# EAGLE board SparkFun_Qwiic_ADXL313-Panel (EAGLE 9.6.2), part 1 of 4
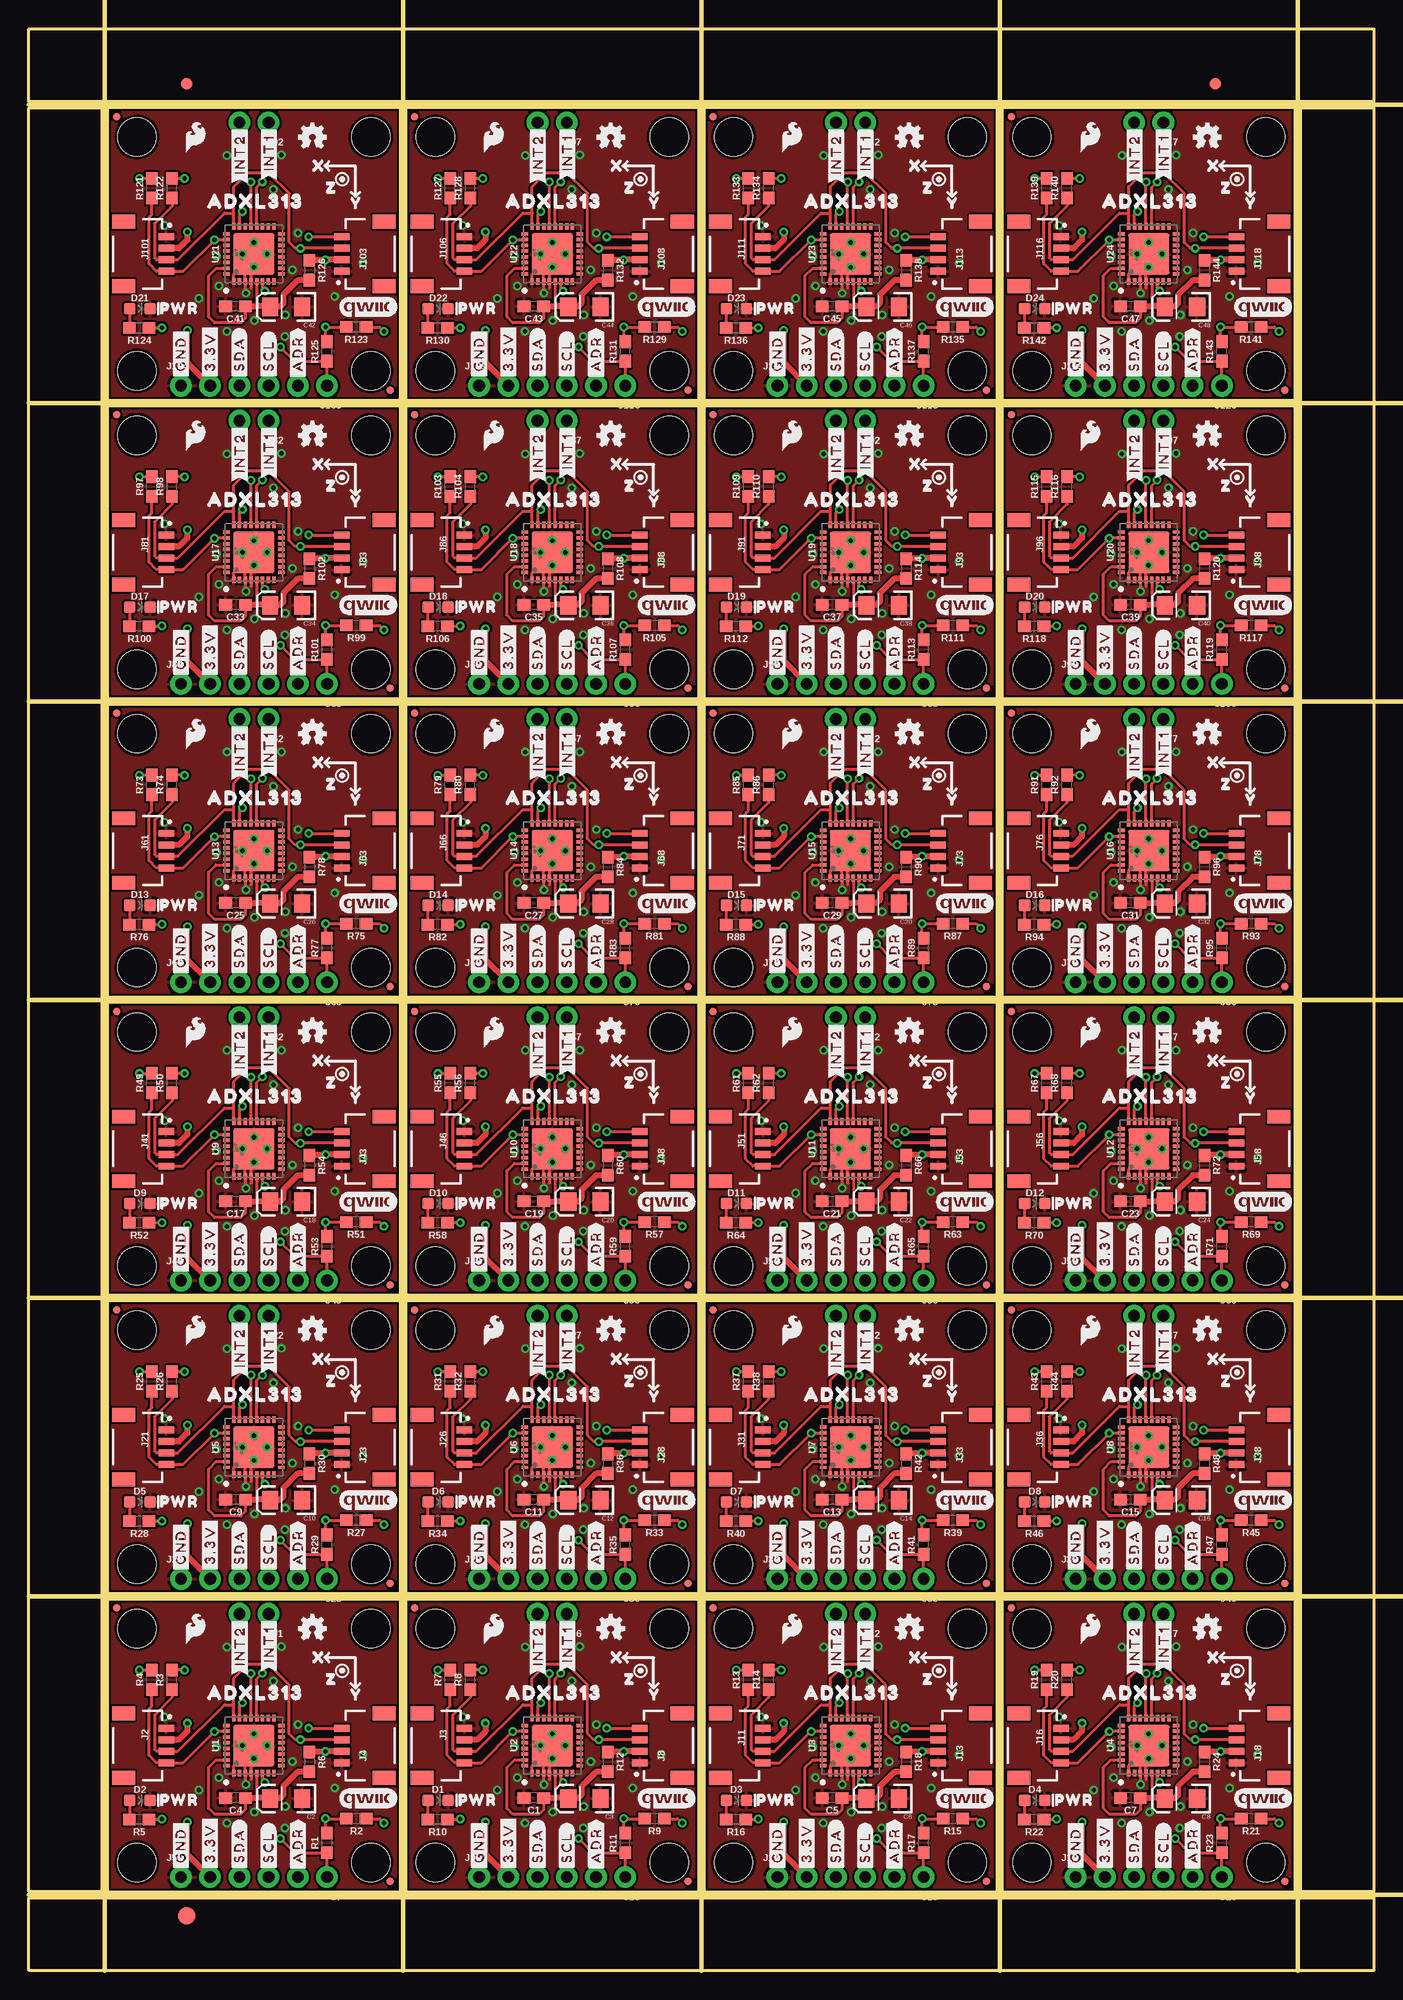
[diagram p0: board, top side]
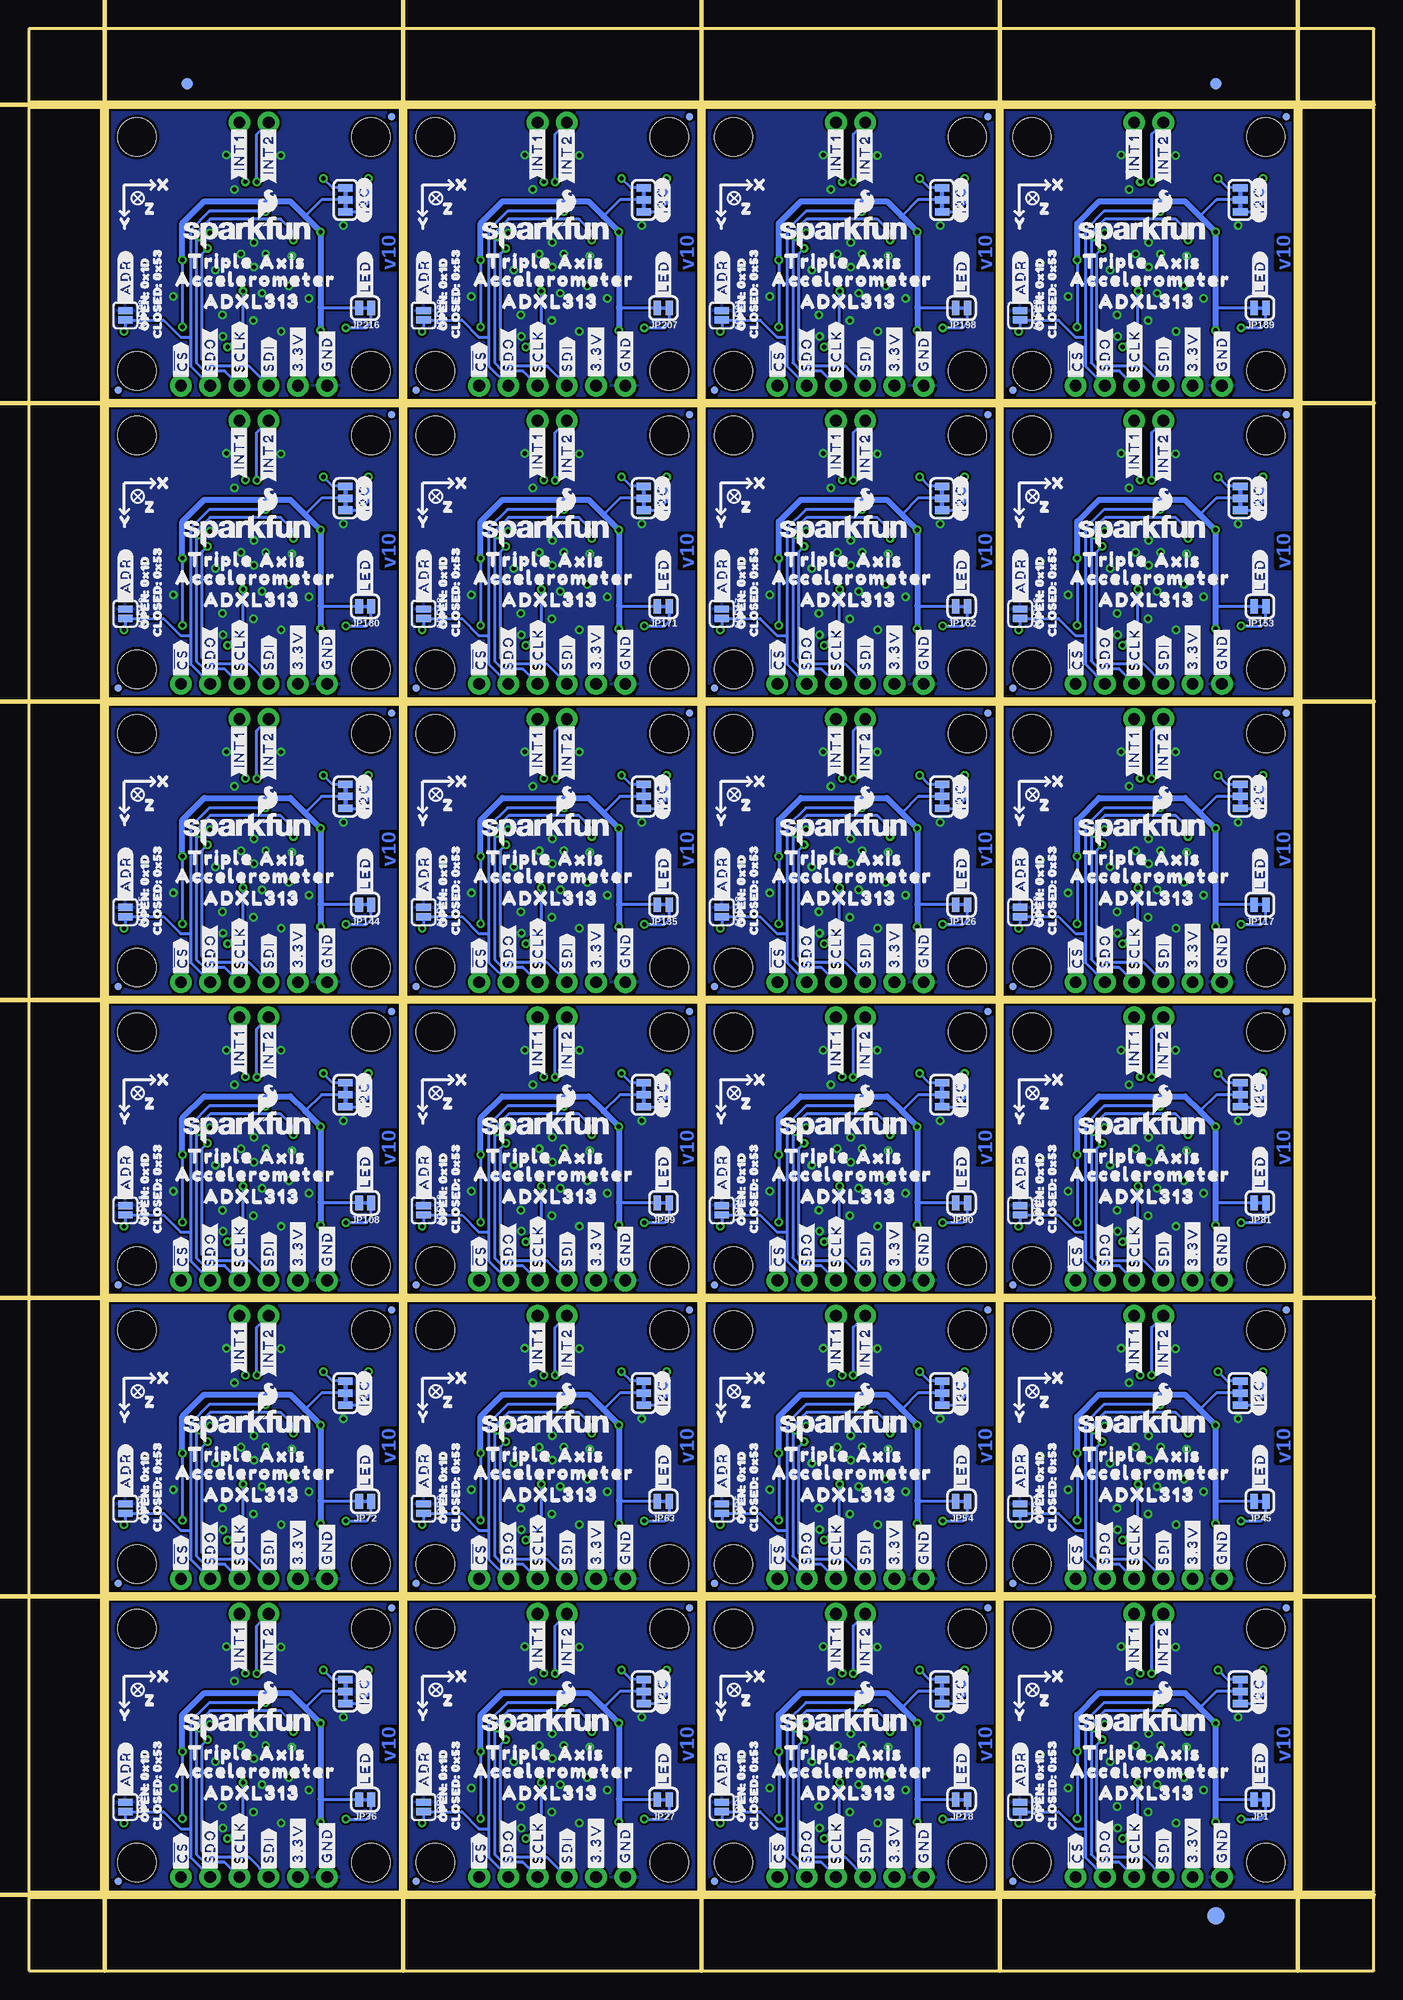
[diagram p1: board, bottom side, seen from below]

Size 116.84 x 168.66 mm. Coordinates in mm from the lower left corner, seen from the top.
Outline: 112 segments
Copper layers (1*16): Top 0.035mm / dielectric 1.5mm / Bottom 0.035mm
Design rules "SparkFun_Qwiic_ADXL313": minimum track width 7mil, minimum drill 15mil, track to track 7mil, track to pad 7mil, pad to pad 7mil, via to via 7mil, smd to smd 7mil, copper to edge 7mil, drill to drill 7mil, minimum pad ring 7mil, minimum via ring 7mil, stop-mask expansion 4mil, vias tented up to drill 25mil, thermal gap 10mil
tRestrict: area 19.1,17.1 to 19.1,17.3; area 17.4,17.1 to 17.4,17.3; area 19.5,17.7 to 19.7,17.8; area 21.4,19.5 to 21.4,19.7; area 19.5,21.4 to 19.6,21.4; area 17.7,19.5 to 17.8,19.6; area 45,17.1 to 45,17.3; area 43.3,17.1 to 43.3,17.3; area 45.4,17.7 to 45.6,17.8; area 47.3,19.5 to 47.3,19.7; area 45.4,21.4 to 45.5,21.4; area 43.6,19.5 to 43.7,19.6; 132 more areas
Milling: 12 lines

## Footprints (pad centres in the part's own frame; a part is rotated, then mirrored left to right if it is on the bottom)
SMT-JUMPER_2_NO_SILK = smd 0.635 x 1.27: 1 -0.406,0; 2 0.406,0
0603 = smd 1.1 x 1: 1 -0.85,0; 2 0.85,0
EIA3216 = smd 1.4 x 1.6: A 1.4,0; C -1.4,0
LED-0603 = smd 1 x 1: A -0.877,0; C 0.877,0
FIDUCIAL-1X2 = smd 1 x 1: 1 0,0
FIDUCIAL-1.5X3 = smd 1.5 x 1.5: 1 0,0
SMT-JUMPER_3_2-NC_TRACE_SILK = smd 0.66 x 1.27: 1 -1.041,0; 2 0,0; 3 1.041,0
1X02_NO_SILK = drill 1.016 pad 1.88: 1 0,0; 2 2.54,0
JST04_1MM_RA = smd 0.6 x 1.35: 1 -1.5,0; 2 -0.5,0; 3 0.5,0; 4 1.5,0 | smd 1.2 x 2: NC1 2.8,-3.675; NC2 -2.8,-3.675
1X04_NO_SILK = drill 1.016 pad 1.88: 1 0,0; 2 2.54,0; 3 5.08,0; 4 7.62,0
SMT-JUMPER_2_NC_TRACE_SILK = smd 0.66 x 1.27: 1 -0.521,0; 2 0.521,0
MICRO-FIDUCIAL = smd 0.635 x 0.635: 1 0,0
STAND-OFF = hole 3.302: 0,0
LFCSP = smd 0.57 x 0.3: 1 -2.385,1.75; 2 -2.385,1.25; 3 -2.385,0.75; 4 -2.385,0.25; 5 -2.385,-0.25; 6 -2.385,-0.75; 7 -2.385,-1.25; 8 -2.385,-1.75; 17 2.385,-1.75; 18 2.385,-1.25; 19 2.385,-0.75; 20 2.385,-0.25; 21 2.385,0.25; 22 2.385,0.75; 23 2.385,1.25; 24 2.385,1.75 | smd 0.3 x 0.57: 9 -1.75,-2.385; 10 -1.25,-2.385; 11 -0.75,-2.385; 12 -0.25,-2.385; 13 0.25,-2.385; 14 0.75,-2.385; 15 1.25,-2.385; 16 1.75,-2.385; 25 1.75,2.385; 26 1.25,2.385; 27 0.75,2.385; 28 0.25,2.385; 29 -0.25,2.385; 30 -0.75,2.385; 31 -1.25,2.385; 32 -1.75,2.385 | smd 3.6 x 3.6: EPAD 0,0

## Placement (x,y rotation side)
ADR  [SMT-JUMPER_2_NO_SILK]  30.73,14.22 270 bottom
ADR1  [SMT-JUMPER_2_NO_SILK]  56.64,14.22 270 bottom
ADR2  [SMT-JUMPER_2_NO_SILK]  82.55,14.22 270 bottom
ADR3  [SMT-JUMPER_2_NO_SILK]  108.46,14.22 270 bottom
ADR4  [SMT-JUMPER_2_NO_SILK]  30.73,40.13 270 bottom
ADR5  [SMT-JUMPER_2_NO_SILK]  56.64,40.13 270 bottom
ADR6  [SMT-JUMPER_2_NO_SILK]  82.55,40.13 270 bottom
ADR7  [SMT-JUMPER_2_NO_SILK]  108.46,40.13 270 bottom
ADR8  [SMT-JUMPER_2_NO_SILK]  30.73,66.04 270 bottom
ADR9  [SMT-JUMPER_2_NO_SILK]  56.64,66.04 270 bottom
ADR10  [SMT-JUMPER_2_NO_SILK]  82.55,66.04 270 bottom
ADR11  [SMT-JUMPER_2_NO_SILK]  108.46,66.04 270 bottom
ADR12  [SMT-JUMPER_2_NO_SILK]  30.73,91.95 270 bottom
ADR13  [SMT-JUMPER_2_NO_SILK]  56.64,91.95 270 bottom
ADR14  [SMT-JUMPER_2_NO_SILK]  82.55,91.95 270 bottom
ADR15  [SMT-JUMPER_2_NO_SILK]  108.46,91.95 270 bottom
ADR16  [SMT-JUMPER_2_NO_SILK]  30.73,117.86 270 bottom
ADR17  [SMT-JUMPER_2_NO_SILK]  56.64,117.86 270 bottom
ADR18  [SMT-JUMPER_2_NO_SILK]  82.55,117.86 270 bottom
ADR19  [SMT-JUMPER_2_NO_SILK]  108.46,117.86 270 bottom
ADR20  [SMT-JUMPER_2_NO_SILK]  30.73,143.76 270 bottom
ADR21  [SMT-JUMPER_2_NO_SILK]  56.64,143.76 270 bottom
ADR22  [SMT-JUMPER_2_NO_SILK]  82.55,143.76 270 bottom
ADR23  [SMT-JUMPER_2_NO_SILK]  108.46,143.76 270 bottom
C1  0.1uF  [0603]  43.87,15.01 180 top
C2  10uF  [EIA3216]  22.35,14.96 180 top
C3  10uF  [EIA3216]  48.26,14.96 180 top
C4  0.1uF  [0603]  17.96,15.01 180 top
C5  0.1uF  [0603]  69.77,15.01 180 top
C6  10uF  [EIA3216]  74.17,14.96 180 top
C7  0.1uF  [0603]  95.68,15.01 180 top
C8  10uF  [EIA3216]  100.08,14.96 180 top
C9  0.1uF  [0603]  17.96,40.92 180 top
C10  10uF  [EIA3216]  22.35,40.87 180 top
C11  0.1uF  [0603]  43.87,40.92 180 top
C12  10uF  [EIA3216]  48.26,40.87 180 top
C13  0.1uF  [0603]  69.77,40.92 180 top
C14  10uF  [EIA3216]  74.17,40.87 180 top
C15  0.1uF  [0603]  95.68,40.92 180 top
C16  10uF  [EIA3216]  100.08,40.87 180 top
C17  0.1uF  [0603]  17.96,66.83 180 top
C18  10uF  [EIA3216]  22.35,66.78 180 top
C19  0.1uF  [0603]  43.87,66.83 180 top
C20  10uF  [EIA3216]  48.26,66.78 180 top
C21  0.1uF  [0603]  69.77,66.83 180 top
C22  10uF  [EIA3216]  74.17,66.78 180 top
C23  0.1uF  [0603]  95.68,66.83 180 top
C24  10uF  [EIA3216]  100.08,66.78 180 top
C25  0.1uF  [0603]  17.96,92.74 180 top
C26  10uF  [EIA3216]  22.35,92.68 180 top
C27  0.1uF  [0603]  43.87,92.74 180 top
C28  10uF  [EIA3216]  48.26,92.68 180 top
C29  0.1uF  [0603]  69.77,92.74 180 top
C30  10uF  [EIA3216]  74.17,92.68 180 top
C31  0.1uF  [0603]  95.68,92.74 180 top
C32  10uF  [EIA3216]  100.08,92.68 180 top
C33  0.1uF  [0603]  17.96,118.64 180 top
C34  10uF  [EIA3216]  22.35,118.59 180 top
C35  0.1uF  [0603]  43.87,118.64 180 top
C36  10uF  [EIA3216]  48.26,118.59 180 top
C37  0.1uF  [0603]  69.77,118.64 180 top
C38  10uF  [EIA3216]  74.17,118.59 180 top
C39  0.1uF  [0603]  95.68,118.64 180 top
C40  10uF  [EIA3216]  100.08,118.59 180 top
C41  0.1uF  [0603]  17.96,144.55 180 top
C42  10uF  [EIA3216]  22.35,144.5 180 top
C43  0.1uF  [0603]  43.87,144.55 180 top
C44  10uF  [EIA3216]  48.26,144.5 180 top
C45  0.1uF  [0603]  69.77,144.55 180 top
C46  10uF  [EIA3216]  74.17,144.5 180 top
C47  0.1uF  [0603]  95.68,144.55 180 top
C48  10uF  [EIA3216]  100.08,144.5 180 top
D1  RED  [LED-0603]  35.56,14.81 0 top
D2  RED  [LED-0603]  9.65,14.81 0 top
D3  RED  [LED-0603]  61.47,14.81 0 top
D4  RED  [LED-0603]  87.38,14.81 0 top
D5  RED  [LED-0603]  9.65,40.72 0 top
D6  RED  [LED-0603]  35.56,40.72 0 top
D7  RED  [LED-0603]  61.47,40.72 0 top
D8  RED  [LED-0603]  87.38,40.72 0 top
D9  RED  [LED-0603]  9.65,66.62 0 top
D10  RED  [LED-0603]  35.56,66.62 0 top
D11  RED  [LED-0603]  61.47,66.62 0 top
D12  RED  [LED-0603]  87.38,66.62 0 top
D13  RED  [LED-0603]  9.65,92.53 0 top
D14  RED  [LED-0603]  35.56,92.53 0 top
D15  RED  [LED-0603]  61.47,92.53 0 top
D16  RED  [LED-0603]  87.38,92.53 0 top
D17  RED  [LED-0603]  9.65,118.44 0 top
D18  RED  [LED-0603]  35.56,118.44 0 top
D19  RED  [LED-0603]  61.47,118.44 0 top
D20  RED  [LED-0603]  87.38,118.44 0 top
D21  RED  [LED-0603]  9.65,144.35 0 top
D22  RED  [LED-0603]  35.56,144.35 0 top
D23  RED  [LED-0603]  61.47,144.35 0 top
D24  RED  [LED-0603]  87.38,144.35 0 top
E$1  [FIDUCIAL-1X2]  13.72,163.89 0 top
E$2  [FIDUCIAL-1X2]  13.72,163.89 0 bottom
E$3  [FIDUCIAL-1X2]  103.06,163.89 0 top
E$4  [FIDUCIAL-1X2]  103.06,163.89 0 bottom
E$5  [FIDUCIAL-1.5X3]  13.72,4.76 0 top
E$6  [FIDUCIAL-1.5X3]  13.72,4.76 0 bottom
I2C  [SMT-JUMPER_3_2-NC_TRACE_SILK]  11.61,24.26 270 bottom
I2C1  [SMT-JUMPER_3_2-NC_TRACE_SILK]  37.52,24.26 270 bottom
I2C2  [SMT-JUMPER_3_2-NC_TRACE_SILK]  63.42,24.26 270 bottom
I2C3  [SMT-JUMPER_3_2-NC_TRACE_SILK]  89.33,24.26 270 bottom
I2C4  [SMT-JUMPER_3_2-NC_TRACE_SILK]  11.61,50.16 270 bottom
I2C5  [SMT-JUMPER_3_2-NC_TRACE_SILK]  37.52,50.16 270 bottom
I2C6  [SMT-JUMPER_3_2-NC_TRACE_SILK]  63.42,50.16 270 bottom
I2C7  [SMT-JUMPER_3_2-NC_TRACE_SILK]  89.33,50.16 270 bottom
I2C8  [SMT-JUMPER_3_2-NC_TRACE_SILK]  11.61,76.07 270 bottom
I2C9  [SMT-JUMPER_3_2-NC_TRACE_SILK]  37.52,76.07 270 bottom
I2C10  [SMT-JUMPER_3_2-NC_TRACE_SILK]  63.42,76.07 270 bottom
I2C11  [SMT-JUMPER_3_2-NC_TRACE_SILK]  89.33,76.07 270 bottom
I2C12  [SMT-JUMPER_3_2-NC_TRACE_SILK]  11.61,101.98 270 bottom
I2C13  [SMT-JUMPER_3_2-NC_TRACE_SILK]  37.52,101.98 270 bottom
I2C14  [SMT-JUMPER_3_2-NC_TRACE_SILK]  63.42,101.98 270 bottom
I2C15  [SMT-JUMPER_3_2-NC_TRACE_SILK]  89.33,101.98 270 bottom
I2C16  [SMT-JUMPER_3_2-NC_TRACE_SILK]  11.61,127.89 270 bottom
I2C17  [SMT-JUMPER_3_2-NC_TRACE_SILK]  37.52,127.89 270 bottom
I2C18  [SMT-JUMPER_3_2-NC_TRACE_SILK]  63.42,127.89 270 bottom
I2C19  [SMT-JUMPER_3_2-NC_TRACE_SILK]  89.33,127.89 270 bottom
I2C20  [SMT-JUMPER_3_2-NC_TRACE_SILK]  11.61,153.8 270 bottom
I2C21  [SMT-JUMPER_3_2-NC_TRACE_SILK]  37.52,153.8 270 bottom
I2C22  [SMT-JUMPER_3_2-NC_TRACE_SILK]  63.42,153.8 270 bottom
I2C23  [SMT-JUMPER_3_2-NC_TRACE_SILK]  89.33,153.8 270 bottom
J1  [1X02_NO_SILK]  20.83,30.99 180 top
J2  QWIIC_RA  [JST04_1MM_RA]  11.94,19.56 270 top
J3  QWIIC_RA  [JST04_1MM_RA]  37.85,19.56 270 top
J4  QWIIC_RA  [JST04_1MM_RA]  27.18,19.56 90 top
J5  [1X04_NO_SILK]  13.21,8.13 0 top
J6  [1X02_NO_SILK]  46.74,30.99 180 top
J7  [1X02_NO_SILK]  25.91,8.13 180 top
J8  QWIIC_RA  [JST04_1MM_RA]  53.09,19.56 90 top
J9  [1X04_NO_SILK]  39.12,8.13 0 top
J10  [1X02_NO_SILK]  51.82,8.13 180 top
J11  QWIIC_RA  [JST04_1MM_RA]  63.75,19.56 270 top
J12  [1X02_NO_SILK]  72.64,30.99 180 top
J13  QWIIC_RA  [JST04_1MM_RA]  78.99,19.56 90 top
J14  [1X04_NO_SILK]  65.02,8.13 0 top
J15  [1X02_NO_SILK]  77.72,8.13 180 top
J16  QWIIC_RA  [JST04_1MM_RA]  89.66,19.56 270 top
J17  [1X02_NO_SILK]  98.55,30.99 180 top
J18  QWIIC_RA  [JST04_1MM_RA]  104.9,19.56 90 top
J19  [1X04_NO_SILK]  90.93,8.13 0 top
J20  [1X02_NO_SILK]  103.63,8.13 180 top
J21  QWIIC_RA  [JST04_1MM_RA]  11.94,45.47 270 top
J22  [1X02_NO_SILK]  20.83,56.9 180 top
J23  QWIIC_RA  [JST04_1MM_RA]  27.18,45.47 90 top
J24  [1X04_NO_SILK]  13.21,34.04 0 top
J25  [1X02_NO_SILK]  25.91,34.04 180 top
J26  QWIIC_RA  [JST04_1MM_RA]  37.85,45.47 270 top
J27  [1X02_NO_SILK]  46.74,56.9 180 top
J28  QWIIC_RA  [JST04_1MM_RA]  53.09,45.47 90 top
J29  [1X04_NO_SILK]  39.12,34.04 0 top
J30  [1X02_NO_SILK]  51.82,34.04 180 top
J31  QWIIC_RA  [JST04_1MM_RA]  63.75,45.47 270 top
J32  [1X02_NO_SILK]  72.64,56.9 180 top
J33  QWIIC_RA  [JST04_1MM_RA]  78.99,45.47 90 top
J34  [1X04_NO_SILK]  65.02,34.04 0 top
J35  [1X02_NO_SILK]  77.72,34.04 180 top
J36  QWIIC_RA  [JST04_1MM_RA]  89.66,45.47 270 top
J37  [1X02_NO_SILK]  98.55,56.9 180 top
J38  QWIIC_RA  [JST04_1MM_RA]  104.9,45.47 90 top
J39  [1X04_NO_SILK]  90.93,34.04 0 top
J40  [1X02_NO_SILK]  103.63,34.04 180 top
J41  QWIIC_RA  [JST04_1MM_RA]  11.94,71.37 270 top
J42  [1X02_NO_SILK]  20.83,82.8 180 top
J43  QWIIC_RA  [JST04_1MM_RA]  27.18,71.37 90 top
J44  [1X04_NO_SILK]  13.21,59.94 0 top
J45  [1X02_NO_SILK]  25.91,59.94 180 top
J46  QWIIC_RA  [JST04_1MM_RA]  37.85,71.37 270 top
J47  [1X02_NO_SILK]  46.74,82.8 180 top
J48  QWIIC_RA  [JST04_1MM_RA]  53.09,71.37 90 top
J49  [1X04_NO_SILK]  39.12,59.94 0 top
J50  [1X02_NO_SILK]  51.82,59.94 180 top
J51  QWIIC_RA  [JST04_1MM_RA]  63.75,71.37 270 top
J52  [1X02_NO_SILK]  72.64,82.8 180 top
J53  QWIIC_RA  [JST04_1MM_RA]  78.99,71.37 90 top
J54  [1X04_NO_SILK]  65.02,59.94 0 top
J55  [1X02_NO_SILK]  77.72,59.94 180 top
J56  QWIIC_RA  [JST04_1MM_RA]  89.66,71.37 270 top
J57  [1X02_NO_SILK]  98.55,82.8 180 top
J58  QWIIC_RA  [JST04_1MM_RA]  104.9,71.37 90 top
J59  [1X04_NO_SILK]  90.93,59.94 0 top
J60  [1X02_NO_SILK]  103.63,59.94 180 top
J61  QWIIC_RA  [JST04_1MM_RA]  11.94,97.28 270 top
J62  [1X02_NO_SILK]  20.83,108.71 180 top
J63  QWIIC_RA  [JST04_1MM_RA]  27.18,97.28 90 top
J64  [1X04_NO_SILK]  13.21,85.85 0 top
J65  [1X02_NO_SILK]  25.91,85.85 180 top
J66  QWIIC_RA  [JST04_1MM_RA]  37.85,97.28 270 top
J67  [1X02_NO_SILK]  46.74,108.71 180 top
J68  QWIIC_RA  [JST04_1MM_RA]  53.09,97.28 90 top
J69  [1X04_NO_SILK]  39.12,85.85 0 top
J70  [1X02_NO_SILK]  51.82,85.85 180 top
J71  QWIIC_RA  [JST04_1MM_RA]  63.75,97.28 270 top
J72  [1X02_NO_SILK]  72.64,108.71 180 top
J73  QWIIC_RA  [JST04_1MM_RA]  78.99,97.28 90 top
J74  [1X04_NO_SILK]  65.02,85.85 0 top
J75  [1X02_NO_SILK]  77.72,85.85 180 top
J76  QWIIC_RA  [JST04_1MM_RA]  89.66,97.28 270 top
J77  [1X02_NO_SILK]  98.55,108.71 180 top
J78  QWIIC_RA  [JST04_1MM_RA]  104.9,97.28 90 top
J79  [1X04_NO_SILK]  90.93,85.85 0 top
J80  [1X02_NO_SILK]  103.63,85.85 180 top
J81  QWIIC_RA  [JST04_1MM_RA]  11.94,123.19 270 top
J82  [1X02_NO_SILK]  20.83,134.62 180 top
J83  QWIIC_RA  [JST04_1MM_RA]  27.18,123.19 90 top
J84  [1X04_NO_SILK]  13.21,111.76 0 top
J85  [1X02_NO_SILK]  25.91,111.76 180 top
J86  QWIIC_RA  [JST04_1MM_RA]  37.85,123.19 270 top
J87  [1X02_NO_SILK]  46.74,134.62 180 top
J88  QWIIC_RA  [JST04_1MM_RA]  53.09,123.19 90 top
J89  [1X04_NO_SILK]  39.12,111.76 0 top
J90  [1X02_NO_SILK]  51.82,111.76 180 top
J91  QWIIC_RA  [JST04_1MM_RA]  63.75,123.19 270 top
J92  [1X02_NO_SILK]  72.64,134.62 180 top
J93  QWIIC_RA  [JST04_1MM_RA]  78.99,123.19 90 top
J94  [1X04_NO_SILK]  65.02,111.76 0 top
J95  [1X02_NO_SILK]  77.72,111.76 180 top
J96  QWIIC_RA  [JST04_1MM_RA]  89.66,123.19 270 top
J97  [1X02_NO_SILK]  98.55,134.62 180 top
J98  QWIIC_RA  [JST04_1MM_RA]  104.9,123.19 90 top
J99  [1X04_NO_SILK]  90.93,111.76 0 top
J100  [1X02_NO_SILK]  103.63,111.76 180 top
J101  QWIIC_RA  [JST04_1MM_RA]  11.94,149.1 270 top
J102  [1X02_NO_SILK]  20.83,160.53 180 top
J103  QWIIC_RA  [JST04_1MM_RA]  27.18,149.1 90 top
J104  [1X04_NO_SILK]  13.21,137.67 0 top
J105  [1X02_NO_SILK]  25.91,137.67 180 top
J106  QWIIC_RA  [JST04_1MM_RA]  37.85,149.1 270 top
J107  [1X02_NO_SILK]  46.74,160.53 180 top
J108  QWIIC_RA  [JST04_1MM_RA]  53.09,149.1 90 top
J109  [1X04_NO_SILK]  39.12,137.67 0 top
J110  [1X02_NO_SILK]  51.82,137.67 180 top
J111  QWIIC_RA  [JST04_1MM_RA]  63.75,149.1 270 top
J112  [1X02_NO_SILK]  72.64,160.53 180 top
J113  QWIIC_RA  [JST04_1MM_RA]  78.99,149.1 90 top
J114  [1X04_NO_SILK]  65.02,137.67 0 top
J115  [1X02_NO_SILK]  77.72,137.67 180 top
J116  QWIIC_RA  [JST04_1MM_RA]  89.66,149.1 270 top
J117  [1X02_NO_SILK]  98.55,160.53 180 top
J118  QWIIC_RA  [JST04_1MM_RA]  104.9,149.1 90 top
J119  [1X04_NO_SILK]  90.93,137.67 0 top
J120  [1X02_NO_SILK]  103.63,137.67 180 top
JP1  LED  [SMT-JUMPER_2_NC_TRACE_SILK]  9.91,14.86 180 bottom
JP2  FIDUCIALUFIDUCIAL  [MICRO-FIDUCIAL]  31.37,7.75 0 top
JP3  STAND-OFF  [STAND-OFF]  9.4,29.72 0 top
JP4  STAND-OFF  [STAND-OFF]  29.72,29.72 0 top
JP5  FIDUCIALUFIDUCIAL  [MICRO-FIDUCIAL]  7.62,31.5 0 bottom
JP6  FIDUCIALUFIDUCIAL  [MICRO-FIDUCIAL]  7.62,31.5 0 top
JP7  STAND-OFF  [STAND-OFF]  35.31,29.72 0 top
JP8  STAND-OFF  [STAND-OFF]  9.4,9.4 0 top
JP9  STAND-OFF  [STAND-OFF]  29.72,9.4 0 top
JP10  STAND-OFF  [STAND-OFF]  55.63,29.72 0 top
JP11  FIDUCIALUFIDUCIAL  [MICRO-FIDUCIAL]  31.37,7.75 0 bottom
JP12  FIDUCIALUFIDUCIAL  [MICRO-FIDUCIAL]  57.28,7.75 0 top
JP13  FIDUCIALUFIDUCIAL  [MICRO-FIDUCIAL]  33.53,31.5 0 top
JP14  FIDUCIALUFIDUCIAL  [MICRO-FIDUCIAL]  57.28,7.75 0 bottom
JP15  FIDUCIALUFIDUCIAL  [MICRO-FIDUCIAL]  33.53,31.5 0 bottom
JP16  STAND-OFF  [STAND-OFF]  35.31,9.4 0 top
JP17  STAND-OFF  [STAND-OFF]  55.63,9.4 0 top
JP18  LED  [SMT-JUMPER_2_NC_TRACE_SILK]  35.81,14.86 180 bottom
JP19  STAND-OFF  [STAND-OFF]  61.21,29.72 0 top
JP20  STAND-OFF  [STAND-OFF]  81.53,29.72 0 top
JP21  FIDUCIALUFIDUCIAL  [MICRO-FIDUCIAL]  83.19,7.75 0 top
JP22  FIDUCIALUFIDUCIAL  [MICRO-FIDUCIAL]  59.44,31.5 0 top
JP23  FIDUCIALUFIDUCIAL  [MICRO-FIDUCIAL]  83.19,7.75 0 bottom
JP24  FIDUCIALUFIDUCIAL  [MICRO-FIDUCIAL]  59.44,31.5 0 bottom
JP25  STAND-OFF  [STAND-OFF]  61.21,9.4 0 top
JP26  STAND-OFF  [STAND-OFF]  81.53,9.4 0 top
JP27  LED  [SMT-JUMPER_2_NC_TRACE_SILK]  61.72,14.86 180 bottom
JP28  STAND-OFF  [STAND-OFF]  87.12,29.72 0 top
JP29  STAND-OFF  [STAND-OFF]  107.44,29.72 0 top
JP30  FIDUCIALUFIDUCIAL  [MICRO-FIDUCIAL]  109.09,7.75 0 top
JP31  FIDUCIALUFIDUCIAL  [MICRO-FIDUCIAL]  85.34,31.5 0 top
JP32  FIDUCIALUFIDUCIAL  [MICRO-FIDUCIAL]  109.09,7.75 0 bottom
JP33  FIDUCIALUFIDUCIAL  [MICRO-FIDUCIAL]  85.34,31.5 0 bottom
JP34  STAND-OFF  [STAND-OFF]  87.12,9.4 0 top
JP35  STAND-OFF  [STAND-OFF]  107.44,9.4 0 top
JP36  LED  [SMT-JUMPER_2_NC_TRACE_SILK]  87.63,14.86 180 bottom
JP37  STAND-OFF  [STAND-OFF]  9.4,55.63 0 top
JP38  STAND-OFF  [STAND-OFF]  29.72,55.63 0 top
JP39  FIDUCIALUFIDUCIAL  [MICRO-FIDUCIAL]  31.37,33.66 0 top
JP40  FIDUCIALUFIDUCIAL  [MICRO-FIDUCIAL]  7.62,57.4 0 top
JP41  FIDUCIALUFIDUCIAL  [MICRO-FIDUCIAL]  31.37,33.66 0 bottom
JP42  FIDUCIALUFIDUCIAL  [MICRO-FIDUCIAL]  7.62,57.4 0 bottom
JP43  STAND-OFF  [STAND-OFF]  9.4,35.31 0 top
JP44  STAND-OFF  [STAND-OFF]  29.72,35.31 0 top
JP45  LED  [SMT-JUMPER_2_NC_TRACE_SILK]  9.91,40.77 180 bottom
JP46  STAND-OFF  [STAND-OFF]  35.31,55.63 0 top
JP47  STAND-OFF  [STAND-OFF]  55.63,55.63 0 top
JP48  FIDUCIALUFIDUCIAL  [MICRO-FIDUCIAL]  57.28,33.66 0 top
JP49  FIDUCIALUFIDUCIAL  [MICRO-FIDUCIAL]  33.53,57.4 0 top
JP50  FIDUCIALUFIDUCIAL  [MICRO-FIDUCIAL]  57.28,33.66 0 bottom
JP51  FIDUCIALUFIDUCIAL  [MICRO-FIDUCIAL]  33.53,57.4 0 bottom
JP52  STAND-OFF  [STAND-OFF]  35.31,35.31 0 top
JP53  STAND-OFF  [STAND-OFF]  55.63,35.31 0 top
JP54  LED  [SMT-JUMPER_2_NC_TRACE_SILK]  35.81,40.77 180 bottom
JP55  STAND-OFF  [STAND-OFF]  61.21,55.63 0 top
JP56  STAND-OFF  [STAND-OFF]  81.53,55.63 0 top
JP57  FIDUCIALUFIDUCIAL  [MICRO-FIDUCIAL]  83.19,33.66 0 top
JP58  FIDUCIALUFIDUCIAL  [MICRO-FIDUCIAL]  59.44,57.4 0 top
JP59  FIDUCIALUFIDUCIAL  [MICRO-FIDUCIAL]  83.19,33.66 0 bottom
JP60  FIDUCIALUFIDUCIAL  [MICRO-FIDUCIAL]  59.44,57.4 0 bottom
JP61  STAND-OFF  [STAND-OFF]  61.21,35.31 0 top
JP62  STAND-OFF  [STAND-OFF]  81.53,35.31 0 top
JP63  LED  [SMT-JUMPER_2_NC_TRACE_SILK]  61.72,40.77 180 bottom
JP64  STAND-OFF  [STAND-OFF]  87.12,55.63 0 top
JP65  STAND-OFF  [STAND-OFF]  107.44,55.63 0 top
JP66  FIDUCIALUFIDUCIAL  [MICRO-FIDUCIAL]  109.09,33.66 0 top
JP67  FIDUCIALUFIDUCIAL  [MICRO-FIDUCIAL]  85.34,57.4 0 top
JP68  FIDUCIALUFIDUCIAL  [MICRO-FIDUCIAL]  109.09,33.66 0 bottom
JP69  FIDUCIALUFIDUCIAL  [MICRO-FIDUCIAL]  85.34,57.4 0 bottom
JP70  STAND-OFF  [STAND-OFF]  87.12,35.31 0 top
JP71  STAND-OFF  [STAND-OFF]  107.44,35.31 0 top
JP72  LED  [SMT-JUMPER_2_NC_TRACE_SILK]  87.63,40.77 180 bottom
JP73  STAND-OFF  [STAND-OFF]  9.4,81.53 0 top
JP74  STAND-OFF  [STAND-OFF]  29.72,81.53 0 top
JP75  FIDUCIALUFIDUCIAL  [MICRO-FIDUCIAL]  31.37,59.56 0 top
JP76  FIDUCIALUFIDUCIAL  [MICRO-FIDUCIAL]  7.62,83.31 0 top
JP77  FIDUCIALUFIDUCIAL  [MICRO-FIDUCIAL]  31.37,59.56 0 bottom
JP78  FIDUCIALUFIDUCIAL  [MICRO-FIDUCIAL]  7.62,83.31 0 bottom
JP79  STAND-OFF  [STAND-OFF]  9.4,61.21 0 top
JP80  STAND-OFF  [STAND-OFF]  29.72,61.21 0 top
JP81  LED  [SMT-JUMPER_2_NC_TRACE_SILK]  9.91,66.67 180 bottom
JP82  STAND-OFF  [STAND-OFF]  35.31,81.53 0 top
JP83  STAND-OFF  [STAND-OFF]  55.63,81.53 0 top
JP84  FIDUCIALUFIDUCIAL  [MICRO-FIDUCIAL]  57.28,59.56 0 top
JP85  FIDUCIALUFIDUCIAL  [MICRO-FIDUCIAL]  33.53,83.31 0 top
JP86  FIDUCIALUFIDUCIAL  [MICRO-FIDUCIAL]  57.28,59.56 0 bottom
JP87  FIDUCIALUFIDUCIAL  [MICRO-FIDUCIAL]  33.53,83.31 0 bottom
JP88  STAND-OFF  [STAND-OFF]  35.31,61.21 0 top
JP89  STAND-OFF  [STAND-OFF]  55.63,61.21 0 top
JP90  LED  [SMT-JUMPER_2_NC_TRACE_SILK]  35.81,66.67 180 bottom
JP91  STAND-OFF  [STAND-OFF]  61.21,81.53 0 top
JP92  STAND-OFF  [STAND-OFF]  81.53,81.53 0 top
JP93  FIDUCIALUFIDUCIAL  [MICRO-FIDUCIAL]  83.19,59.56 0 top
JP94  FIDUCIALUFIDUCIAL  [MICRO-FIDUCIAL]  59.44,83.31 0 top
JP95  FIDUCIALUFIDUCIAL  [MICRO-FIDUCIAL]  83.19,59.56 0 bottom
JP96  FIDUCIALUFIDUCIAL  [MICRO-FIDUCIAL]  59.44,83.31 0 bottom
JP97  STAND-OFF  [STAND-OFF]  61.21,61.21 0 top
JP98  STAND-OFF  [STAND-OFF]  81.53,61.21 0 top
JP99  LED  [SMT-JUMPER_2_NC_TRACE_SILK]  61.72,66.67 180 bottom
JP100  STAND-OFF  [STAND-OFF]  87.12,81.53 0 top
JP101  STAND-OFF  [STAND-OFF]  107.44,81.53 0 top
JP102  FIDUCIALUFIDUCIAL  [MICRO-FIDUCIAL]  109.09,59.56 0 top
JP103  FIDUCIALUFIDUCIAL  [MICRO-FIDUCIAL]  85.34,83.31 0 top
JP104  FIDUCIALUFIDUCIAL  [MICRO-FIDUCIAL]  109.09,59.56 0 bottom
JP105  FIDUCIALUFIDUCIAL  [MICRO-FIDUCIAL]  85.34,83.31 0 bottom
JP106  STAND-OFF  [STAND-OFF]  87.12,61.21 0 top
JP107  STAND-OFF  [STAND-OFF]  107.44,61.21 0 top
JP108  LED  [SMT-JUMPER_2_NC_TRACE_SILK]  87.63,66.67 180 bottom
JP109  STAND-OFF  [STAND-OFF]  9.4,107.44 0 top
JP110  STAND-OFF  [STAND-OFF]  29.72,107.44 0 top
JP111  FIDUCIALUFIDUCIAL  [MICRO-FIDUCIAL]  31.37,85.47 0 top
JP112  FIDUCIALUFIDUCIAL  [MICRO-FIDUCIAL]  7.62,109.22 0 top
JP113  FIDUCIALUFIDUCIAL  [MICRO-FIDUCIAL]  31.37,85.47 0 bottom
JP114  FIDUCIALUFIDUCIAL  [MICRO-FIDUCIAL]  7.62,109.22 0 bottom
JP115  STAND-OFF  [STAND-OFF]  9.4,87.12 0 top
JP116  STAND-OFF  [STAND-OFF]  29.72,87.12 0 top
JP117  LED  [SMT-JUMPER_2_NC_TRACE_SILK]  9.91,92.58 180 bottom
JP118  STAND-OFF  [STAND-OFF]  35.31,107.44 0 top
JP119  STAND-OFF  [STAND-OFF]  55.63,107.44 0 top
JP120  FIDUCIALUFIDUCIAL  [MICRO-FIDUCIAL]  57.28,85.47 0 top
JP121  FIDUCIALUFIDUCIAL  [MICRO-FIDUCIAL]  33.53,109.22 0 top
JP122  FIDUCIALUFIDUCIAL  [MICRO-FIDUCIAL]  57.28,85.47 0 bottom
JP123  FIDUCIALUFIDUCIAL  [MICRO-FIDUCIAL]  33.53,109.22 0 bottom
JP124  STAND-OFF  [STAND-OFF]  35.31,87.12 0 top
JP125  STAND-OFF  [STAND-OFF]  55.63,87.12 0 top
JP126  LED  [SMT-JUMPER_2_NC_TRACE_SILK]  35.81,92.58 180 bottom
JP127  STAND-OFF  [STAND-OFF]  61.21,107.44 0 top
JP128  STAND-OFF  [STAND-OFF]  81.53,107.44 0 top
JP129  FIDUCIALUFIDUCIAL  [MICRO-FIDUCIAL]  83.19,85.47 0 top
JP130  FIDUCIALUFIDUCIAL  [MICRO-FIDUCIAL]  59.44,109.22 0 top
JP131  FIDUCIALUFIDUCIAL  [MICRO-FIDUCIAL]  83.19,85.47 0 bottom
JP132  FIDUCIALUFIDUCIAL  [MICRO-FIDUCIAL]  59.44,109.22 0 bottom
JP133  STAND-OFF  [STAND-OFF]  61.21,87.12 0 top
JP134  STAND-OFF  [STAND-OFF]  81.53,87.12 0 top
JP135  LED  [SMT-JUMPER_2_NC_TRACE_SILK]  61.72,92.58 180 bottom
JP136  STAND-OFF  [STAND-OFF]  87.12,107.44 0 top
JP137  STAND-OFF  [STAND-OFF]  107.44,107.44 0 top
JP138  FIDUCIALUFIDUCIAL  [MICRO-FIDUCIAL]  109.09,85.47 0 top
JP139  FIDUCIALUFIDUCIAL  [MICRO-FIDUCIAL]  85.34,109.22 0 top
JP140  FIDUCIALUFIDUCIAL  [MICRO-FIDUCIAL]  109.09,85.47 0 bottom
JP141  FIDUCIALUFIDUCIAL  [MICRO-FIDUCIAL]  85.34,109.22 0 bottom
JP142  STAND-OFF  [STAND-OFF]  87.12,87.12 0 top
JP143  STAND-OFF  [STAND-OFF]  107.44,87.12 0 top
JP144  LED  [SMT-JUMPER_2_NC_TRACE_SILK]  87.63,92.58 180 bottom
JP145  STAND-OFF  [STAND-OFF]  9.4,133.35 0 top
JP146  STAND-OFF  [STAND-OFF]  29.72,133.35 0 top
JP147  FIDUCIALUFIDUCIAL  [MICRO-FIDUCIAL]  31.37,111.38 0 top
JP148  FIDUCIALUFIDUCIAL  [MICRO-FIDUCIAL]  7.62,135.13 0 top
JP149  FIDUCIALUFIDUCIAL  [MICRO-FIDUCIAL]  31.37,111.38 0 bottom
JP150  FIDUCIALUFIDUCIAL  [MICRO-FIDUCIAL]  7.62,135.13 0 bottom
JP151  STAND-OFF  [STAND-OFF]  9.4,113.03 0 top
JP152  STAND-OFF  [STAND-OFF]  29.72,113.03 0 top
JP153  LED  [SMT-JUMPER_2_NC_TRACE_SILK]  9.91,118.49 180 bottom
JP154  STAND-OFF  [STAND-OFF]  35.31,133.35 0 top
JP155  STAND-OFF  [STAND-OFF]  55.63,133.35 0 top
JP156  FIDUCIALUFIDUCIAL  [MICRO-FIDUCIAL]  57.28,111.38 0 top
JP157  FIDUCIALUFIDUCIAL  [MICRO-FIDUCIAL]  33.53,135.13 0 top
JP158  FIDUCIALUFIDUCIAL  [MICRO-FIDUCIAL]  57.28,111.38 0 bottom
JP159  FIDUCIALUFIDUCIAL  [MICRO-FIDUCIAL]  33.53,135.13 0 bottom
JP160  STAND-OFF  [STAND-OFF]  35.31,113.03 0 top
JP161  STAND-OFF  [STAND-OFF]  55.63,113.03 0 top
JP162  LED  [SMT-JUMPER_2_NC_TRACE_SILK]  35.81,118.49 180 bottom
JP163  STAND-OFF  [STAND-OFF]  61.21,133.35 0 top
JP164  STAND-OFF  [STAND-OFF]  81.53,133.35 0 top
JP165  FIDUCIALUFIDUCIAL  [MICRO-FIDUCIAL]  83.19,111.38 0 top
JP166  FIDUCIALUFIDUCIAL  [MICRO-FIDUCIAL]  59.44,135.13 0 top
JP167  FIDUCIALUFIDUCIAL  [MICRO-FIDUCIAL]  83.19,111.38 0 bottom
JP168  FIDUCIALUFIDUCIAL  [MICRO-FIDUCIAL]  59.44,135.13 0 bottom
JP169  STAND-OFF  [STAND-OFF]  61.21,113.03 0 top
JP170  STAND-OFF  [STAND-OFF]  81.53,113.03 0 top
JP171  LED  [SMT-JUMPER_2_NC_TRACE_SILK]  61.72,118.49 180 bottom
JP172  STAND-OFF  [STAND-OFF]  87.12,133.35 0 top
JP173  STAND-OFF  [STAND-OFF]  107.44,133.35 0 top
JP174  FIDUCIALUFIDUCIAL  [MICRO-FIDUCIAL]  109.09,111.38 0 top
JP175  FIDUCIALUFIDUCIAL  [MICRO-FIDUCIAL]  85.34,135.13 0 top
JP176  FIDUCIALUFIDUCIAL  [MICRO-FIDUCIAL]  109.09,111.38 0 bottom
JP177  FIDUCIALUFIDUCIAL  [MICRO-FIDUCIAL]  85.34,135.13 0 bottom
JP178  STAND-OFF  [STAND-OFF]  87.12,113.03 0 top
JP179  STAND-OFF  [STAND-OFF]  107.44,113.03 0 top
JP180  LED  [SMT-JUMPER_2_NC_TRACE_SILK]  87.63,118.49 180 bottom
JP181  STAND-OFF  [STAND-OFF]  9.4,159.26 0 top
JP182  STAND-OFF  [STAND-OFF]  29.72,159.26 0 top
JP183  FIDUCIALUFIDUCIAL  [MICRO-FIDUCIAL]  31.37,137.29 0 top
JP184  FIDUCIALUFIDUCIAL  [MICRO-FIDUCIAL]  7.62,161.04 0 top
JP185  FIDUCIALUFIDUCIAL  [MICRO-FIDUCIAL]  31.37,137.29 0 bottom
JP186  FIDUCIALUFIDUCIAL  [MICRO-FIDUCIAL]  7.62,161.04 0 bottom
JP187  STAND-OFF  [STAND-OFF]  9.4,138.94 0 top
JP188  STAND-OFF  [STAND-OFF]  29.72,138.94 0 top
JP189  LED  [SMT-JUMPER_2_NC_TRACE_SILK]  9.91,144.4 180 bottom
JP190  STAND-OFF  [STAND-OFF]  35.31,159.26 0 top
JP191  STAND-OFF  [STAND-OFF]  55.63,159.26 0 top
JP192  FIDUCIALUFIDUCIAL  [MICRO-FIDUCIAL]  57.28,137.29 0 top
JP193  FIDUCIALUFIDUCIAL  [MICRO-FIDUCIAL]  33.53,161.04 0 top
JP194  FIDUCIALUFIDUCIAL  [MICRO-FIDUCIAL]  57.28,137.29 0 bottom
JP195  FIDUCIALUFIDUCIAL  [MICRO-FIDUCIAL]  33.53,161.04 0 bottom
JP196  STAND-OFF  [STAND-OFF]  35.31,138.94 0 top
JP197  STAND-OFF  [STAND-OFF]  55.63,138.94 0 top
JP198  LED  [SMT-JUMPER_2_NC_TRACE_SILK]  35.81,144.4 180 bottom
JP199  STAND-OFF  [STAND-OFF]  61.21,159.26 0 top
JP200  STAND-OFF  [STAND-OFF]  81.53,159.26 0 top
JP201  FIDUCIALUFIDUCIAL  [MICRO-FIDUCIAL]  83.19,137.29 0 top
JP202  FIDUCIALUFIDUCIAL  [MICRO-FIDUCIAL]  59.44,161.04 0 top
JP203  FIDUCIALUFIDUCIAL  [MICRO-FIDUCIAL]  83.19,137.29 0 bottom
JP204  FIDUCIALUFIDUCIAL  [MICRO-FIDUCIAL]  59.44,161.04 0 bottom
JP205  STAND-OFF  [STAND-OFF]  61.21,138.94 0 top
JP206  STAND-OFF  [STAND-OFF]  81.53,138.94 0 top
JP207  LED  [SMT-JUMPER_2_NC_TRACE_SILK]  61.72,144.4 180 bottom
JP208  STAND-OFF  [STAND-OFF]  87.12,159.26 0 top
JP209  STAND-OFF  [STAND-OFF]  107.44,159.26 0 top
JP210  FIDUCIALUFIDUCIAL  [MICRO-FIDUCIAL]  109.09,137.29 0 top
JP211  FIDUCIALUFIDUCIAL  [MICRO-FIDUCIAL]  85.34,161.04 0 top
JP212  FIDUCIALUFIDUCIAL  [MICRO-FIDUCIAL]  109.09,137.29 0 bottom
JP213  FIDUCIALUFIDUCIAL  [MICRO-FIDUCIAL]  85.34,161.04 0 bottom
JP214  STAND-OFF  [STAND-OFF]  87.12,138.94 0 top
JP215  STAND-OFF  [STAND-OFF]  107.44,138.94 0 top
JP216  LED  [SMT-JUMPER_2_NC_TRACE_SILK]  87.63,144.4 180 bottom
LOGO1  OSHW-LOGOMINI  [OSHW-LOGO-MINI]  24.64,29.72 0 top
LOGO2  SFE_LOGO_NAME_FLAME.1_INCH  [SFE_LOGO_NAME_FLAME_.1]  20.09,21.44 0 bottom
LOGO3  SFE_LOGO_FLAME.1_INCH  [SFE_LOGO_FLAME_.1]  14.48,29.72 0 top
LOGO4  QWIIC_LOGO_5MM  [QWIIC_5MM]  29.46,14.99 0 top
LOGO5  OSHW-LOGOMINI  [OSHW-LOGO-MINI]  50.55,29.72 0 top
LOGO6  SFE_LOGO_NAME_FLAME.1_INCH  [SFE_LOGO_NAME_FLAME_.1]  46,21.44 0 bottom
LOGO7  QWIIC_LOGO_5MM  [QWIIC_5MM]  55.37,14.99 0 top
LOGO8  SFE_LOGO_FLAME.1_INCH  [SFE_LOGO_FLAME_.1]  40.39,29.72 0 top
LOGO9  OSHW-LOGOMINI  [OSHW-LOGO-MINI]  76.45,29.72 0 top
LOGO10  SFE_LOGO_NAME_FLAME.1_INCH  [SFE_LOGO_NAME_FLAME_.1]  71.91,21.44 0 bottom
LOGO11  QWIIC_LOGO_5MM  [QWIIC_5MM]  81.28,14.99 0 top
LOGO12  SFE_LOGO_FLAME.1_INCH  [SFE_LOGO_FLAME_.1]  66.29,29.72 0 top
LOGO13  OSHW-LOGOMINI  [OSHW-LOGO-MINI]  102.36,29.72 0 top
LOGO14  SFE_LOGO_NAME_FLAME.1_INCH  [SFE_LOGO_NAME_FLAME_.1]  97.82,21.44 0 bottom
LOGO15  QWIIC_LOGO_5MM  [QWIIC_5MM]  107.19,14.99 0 top
LOGO16  SFE_LOGO_FLAME.1_INCH  [SFE_LOGO_FLAME_.1]  92.2,29.72 0 top
LOGO17  OSHW-LOGOMINI  [OSHW-LOGO-MINI]  24.64,55.63 0 top
LOGO18  SFE_LOGO_NAME_FLAME.1_INCH  [SFE_LOGO_NAME_FLAME_.1]  20.09,47.35 0 bottom
LOGO19  QWIIC_LOGO_5MM  [QWIIC_5MM]  29.46,40.89 0 top
LOGO20  SFE_LOGO_FLAME.1_INCH  [SFE_LOGO_FLAME_.1]  14.48,55.63 0 top
LOGO21  OSHW-LOGOMINI  [OSHW-LOGO-MINI]  50.55,55.63 0 top
LOGO22  SFE_LOGO_NAME_FLAME.1_INCH  [SFE_LOGO_NAME_FLAME_.1]  46,47.35 0 bottom
LOGO23  QWIIC_LOGO_5MM  [QWIIC_5MM]  55.37,40.89 0 top
LOGO24  SFE_LOGO_FLAME.1_INCH  [SFE_LOGO_FLAME_.1]  40.39,55.63 0 top
LOGO25  OSHW-LOGOMINI  [OSHW-LOGO-MINI]  76.45,55.63 0 top
LOGO26  SFE_LOGO_NAME_FLAME.1_INCH  [SFE_LOGO_NAME_FLAME_.1]  71.91,47.35 0 bottom
LOGO27  QWIIC_LOGO_5MM  [QWIIC_5MM]  81.28,40.89 0 top
LOGO28  SFE_LOGO_FLAME.1_INCH  [SFE_LOGO_FLAME_.1]  66.29,55.63 0 top
LOGO29  OSHW-LOGOMINI  [OSHW-LOGO-MINI]  102.36,55.63 0 top
LOGO30  SFE_LOGO_NAME_FLAME.1_INCH  [SFE_LOGO_NAME_FLAME_.1]  97.82,47.35 0 bottom
LOGO31  QWIIC_LOGO_5MM  [QWIIC_5MM]  107.19,40.89 0 top
LOGO32  SFE_LOGO_FLAME.1_INCH  [SFE_LOGO_FLAME_.1]  92.2,55.63 0 top
LOGO33  OSHW-LOGOMINI  [OSHW-LOGO-MINI]  24.64,81.53 0 top
LOGO34  SFE_LOGO_NAME_FLAME.1_INCH  [SFE_LOGO_NAME_FLAME_.1]  20.09,73.25 0 bottom
LOGO35  QWIIC_LOGO_5MM  [QWIIC_5MM]  29.46,66.8 0 top
LOGO36  SFE_LOGO_FLAME.1_INCH  [SFE_LOGO_FLAME_.1]  14.48,81.53 0 top
LOGO37  OSHW-LOGOMINI  [OSHW-LOGO-MINI]  50.55,81.53 0 top
LOGO38  SFE_LOGO_NAME_FLAME.1_INCH  [SFE_LOGO_NAME_FLAME_.1]  46,73.25 0 bottom
LOGO39  QWIIC_LOGO_5MM  [QWIIC_5MM]  55.37,66.8 0 top
LOGO40  SFE_LOGO_FLAME.1_INCH  [SFE_LOGO_FLAME_.1]  40.39,81.53 0 top
LOGO41  OSHW-LOGOMINI  [OSHW-LOGO-MINI]  76.45,81.53 0 top
LOGO42  SFE_LOGO_NAME_FLAME.1_INCH  [SFE_LOGO_NAME_FLAME_.1]  71.91,73.25 0 bottom
LOGO43  QWIIC_LOGO_5MM  [QWIIC_5MM]  81.28,66.8 0 top
LOGO44  SFE_LOGO_FLAME.1_INCH  [SFE_LOGO_FLAME_.1]  66.29,81.53 0 top
LOGO45  OSHW-LOGOMINI  [OSHW-LOGO-MINI]  102.36,81.53 0 top
LOGO46  SFE_LOGO_NAME_FLAME.1_INCH  [SFE_LOGO_NAME_FLAME_.1]  97.82,73.25 0 bottom
LOGO47  QWIIC_LOGO_5MM  [QWIIC_5MM]  107.19,66.8 0 top
LOGO48  SFE_LOGO_FLAME.1_INCH  [SFE_LOGO_FLAME_.1]  92.2,81.53 0 top
LOGO49  OSHW-LOGOMINI  [OSHW-LOGO-MINI]  24.64,107.44 0 top
LOGO50  SFE_LOGO_NAME_FLAME.1_INCH  [SFE_LOGO_NAME_FLAME_.1]  20.09,99.16 0 bottom
LOGO51  QWIIC_LOGO_5MM  [QWIIC_5MM]  29.46,92.71 0 top
LOGO52  SFE_LOGO_FLAME.1_INCH  [SFE_LOGO_FLAME_.1]  14.48,107.44 0 top
LOGO53  OSHW-LOGOMINI  [OSHW-LOGO-MINI]  50.55,107.44 0 top
LOGO54  SFE_LOGO_NAME_FLAME.1_INCH  [SFE_LOGO_NAME_FLAME_.1]  46,99.16 0 bottom
LOGO55  QWIIC_LOGO_5MM  [QWIIC_5MM]  55.37,92.71 0 top
LOGO56  SFE_LOGO_FLAME.1_INCH  [SFE_LOGO_FLAME_.1]  40.39,107.44 0 top
LOGO57  OSHW-LOGOMINI  [OSHW-LOGO-MINI]  76.45,107.44 0 top
LOGO58  SFE_LOGO_NAME_FLAME.1_INCH  [SFE_LOGO_NAME_FLAME_.1]  71.91,99.16 0 bottom
LOGO59  QWIIC_LOGO_5MM  [QWIIC_5MM]  81.28,92.71 0 top
LOGO60  SFE_LOGO_FLAME.1_INCH  [SFE_LOGO_FLAME_.1]  66.29,107.44 0 top
LOGO61  OSHW-LOGOMINI  [OSHW-LOGO-MINI]  102.36,107.44 0 top
LOGO62  SFE_LOGO_NAME_FLAME.1_INCH  [SFE_LOGO_NAME_FLAME_.1]  97.82,99.16 0 bottom
LOGO63  QWIIC_LOGO_5MM  [QWIIC_5MM]  107.19,92.71 0 top
LOGO64  SFE_LOGO_FLAME.1_INCH  [SFE_LOGO_FLAME_.1]  92.2,107.44 0 top
LOGO65  OSHW-LOGOMINI  [OSHW-LOGO-MINI]  24.64,133.35 0 top
LOGO66  SFE_LOGO_NAME_FLAME.1_INCH  [SFE_LOGO_NAME_FLAME_.1]  20.09,125.07 0 bottom
LOGO67  QWIIC_LOGO_5MM  [QWIIC_5MM]  29.46,118.62 0 top
LOGO68  SFE_LOGO_FLAME.1_INCH  [SFE_LOGO_FLAME_.1]  14.48,133.35 0 top
LOGO69  OSHW-LOGOMINI  [OSHW-LOGO-MINI]  50.55,133.35 0 top
LOGO70  SFE_LOGO_NAME_FLAME.1_INCH  [SFE_LOGO_NAME_FLAME_.1]  46,125.07 0 bottom
LOGO71  QWIIC_LOGO_5MM  [QWIIC_5MM]  55.37,118.62 0 top
LOGO72  SFE_LOGO_FLAME.1_INCH  [SFE_LOGO_FLAME_.1]  40.39,133.35 0 top
LOGO73  OSHW-LOGOMINI  [OSHW-LOGO-MINI]  76.45,133.35 0 top
LOGO74  SFE_LOGO_NAME_FLAME.1_INCH  [SFE_LOGO_NAME_FLAME_.1]  71.91,125.07 0 bottom
LOGO75  QWIIC_LOGO_5MM  [QWIIC_5MM]  81.28,118.62 0 top
LOGO76  SFE_LOGO_FLAME.1_INCH  [SFE_LOGO_FLAME_.1]  66.29,133.35 0 top
LOGO77  OSHW-LOGOMINI  [OSHW-LOGO-MINI]  102.36,133.35 0 top
LOGO78  SFE_LOGO_NAME_FLAME.1_INCH  [SFE_LOGO_NAME_FLAME_.1]  97.82,125.07 0 bottom
LOGO79  QWIIC_LOGO_5MM  [QWIIC_5MM]  107.19,118.62 0 top
LOGO80  SFE_LOGO_FLAME.1_INCH  [SFE_LOGO_FLAME_.1]  92.2,133.35 0 top
LOGO81  OSHW-LOGOMINI  [OSHW-LOGO-MINI]  24.64,159.26 0 top
LOGO82  SFE_LOGO_NAME_FLAME.1_INCH  [SFE_LOGO_NAME_FLAME_.1]  20.09,150.98 0 bottom
LOGO83  QWIIC_LOGO_5MM  [QWIIC_5MM]  29.46,144.53 0 top
LOGO84  SFE_LOGO_FLAME.1_INCH  [SFE_LOGO_FLAME_.1]  14.48,159.26 0 top
LOGO85  OSHW-LOGOMINI  [OSHW-LOGO-MINI]  50.55,159.26 0 top
LOGO86  SFE_LOGO_NAME_FLAME.1_INCH  [SFE_LOGO_NAME_FLAME_.1]  46,150.98 0 bottom
LOGO87  QWIIC_LOGO_5MM  [QWIIC_5MM]  55.37,144.53 0 top
LOGO88  SFE_LOGO_FLAME.1_INCH  [SFE_LOGO_FLAME_.1]  40.39,159.26 0 top
LOGO89  OSHW-LOGOMINI  [OSHW-LOGO-MINI]  76.45,159.26 0 top
LOGO90  SFE_LOGO_NAME_FLAME.1_INCH  [SFE_LOGO_NAME_FLAME_.1]  71.91,150.98 0 bottom
LOGO91  QWIIC_LOGO_5MM  [QWIIC_5MM]  81.28,144.53 0 top
LOGO92  SFE_LOGO_FLAME.1_INCH  [SFE_LOGO_FLAME_.1]  66.29,159.26 0 top
LOGO93  OSHW-LOGOMINI  [OSHW-LOGO-MINI]  102.36,159.26 0 top
LOGO94  SFE_LOGO_NAME_FLAME.1_INCH  [SFE_LOGO_NAME_FLAME_.1]  97.82,150.98 0 bottom
LOGO95  QWIIC_LOGO_5MM  [QWIIC_5MM]  107.19,144.53 0 top
LOGO96  SFE_LOGO_FLAME.1_INCH  [SFE_LOGO_FLAME_.1]  92.2,159.26 0 top
R1  10k  [0603]  25.91,11.1 90 top
R2  10k  [0603]  28.45,13.21 180 top
R3  4.7k  [0603]  12.45,25.27 90 top
R4  4.7k  [0603]  10.69,25.27 90 top
R5  1k  [0603]  9.6,13.13 180 top
R6  0  [0603]  24.38,18.14 270 top
R7  4.7k  [0603]  36.6,25.27 90 top
R8  4.7k  [0603]  38.35,25.27 90 top
R9  10k  [0603]  54.36,13.21 180 top
R10  1k  [0603]  35.51,13.13 180 top
R11  10k  [0603]  51.82,11.1 90 top
R12  0  [0603]  50.29,18.14 270 top
R13  4.7k  [0603]  62.51,25.27 90 top
R14  4.7k  [0603]  64.26,25.27 90 top
R15  10k  [0603]  80.26,13.21 180 top
R16  1k  [0603]  61.42,13.13 180 top
R17  10k  [0603]  77.72,11.1 90 top
R18  0  [0603]  76.2,18.14 270 top
R19  4.7k  [0603]  88.42,25.27 90 top
R20  4.7k  [0603]  90.17,25.27 90 top
R21  10k  [0603]  106.17,13.21 180 top
R22  1k  [0603]  87.33,13.13 180 top
R23  10k  [0603]  103.63,11.1 90 top
R24  0  [0603]  102.11,18.14 270 top
R25  4.7k  [0603]  10.69,51.18 90 top
R26  4.7k  [0603]  12.45,51.18 90 top
R27  10k  [0603]  28.45,39.12 180 top
R28  1k  [0603]  9.6,39.04 180 top
R29  10k  [0603]  25.91,37.01 90 top
R30  0  [0603]  24.38,44.04 270 top
R31  4.7k  [0603]  36.6,51.18 90 top
R32  4.7k  [0603]  38.35,51.18 90 top
R33  10k  [0603]  54.36,39.12 180 top
R34  1k  [0603]  35.51,39.04 180 top
R35  10k  [0603]  51.82,37.01 90 top
R36  0  [0603]  50.29,44.04 270 top
R37  4.7k  [0603]  62.51,51.18 90 top
R38  4.7k  [0603]  64.26,51.18 90 top
R39  10k  [0603]  80.26,39.12 180 top
R40  1k  [0603]  61.42,39.04 180 top
R41  10k  [0603]  77.72,37.01 90 top
R42  0  [0603]  76.2,44.04 270 top
R43  4.7k  [0603]  88.42,51.18 90 top
R44  4.7k  [0603]  90.17,51.18 90 top
R45  10k  [0603]  106.17,39.12 180 top
R46  1k  [0603]  87.33,39.04 180 top
R47  10k  [0603]  103.63,37.01 90 top
R48  0  [0603]  102.11,44.04 270 top
R49  4.7k  [0603]  10.69,77.09 90 top
R50  4.7k  [0603]  12.45,77.09 90 top
R51  10k  [0603]  28.45,65.02 180 top
R52  1k  [0603]  9.6,64.95 180 top
R53  10k  [0603]  25.91,62.92 90 top
R54  0  [0603]  24.38,69.95 270 top
R55  4.7k  [0603]  36.6,77.09 90 top
R56  4.7k  [0603]  38.35,77.09 90 top
R57  10k  [0603]  54.36,65.02 180 top
R58  1k  [0603]  35.51,64.95 180 top
R59  10k  [0603]  51.82,62.92 90 top
R60  0  [0603]  50.29,69.95 270 top
R61  4.7k  [0603]  62.51,77.09 90 top
R62  4.7k  [0603]  64.26,77.09 90 top
R63  10k  [0603]  80.26,65.02 180 top
R64  1k  [0603]  61.42,64.95 180 top
R65  10k  [0603]  77.72,62.92 90 top
R66  0  [0603]  76.2,69.95 270 top
R67  4.7k  [0603]  88.42,77.09 90 top
R68  4.7k  [0603]  90.17,77.09 90 top
R69  10k  [0603]  106.17,65.02 180 top
R70  1k  [0603]  87.33,64.95 180 top
R71  10k  [0603]  103.63,62.92 90 top
R72  0  [0603]  102.11,69.95 270 top
R73  4.7k  [0603]  10.69,103 90 top
R74  4.7k  [0603]  12.45,103 90 top
R75  10k  [0603]  28.45,90.93 180 top
R76  1k  [0603]  9.6,90.86 180 top
R77  10k  [0603]  25.91,88.82 90 top
R78  0  [0603]  24.38,95.86 270 top
R79  4.7k  [0603]  36.6,103 90 top
R80  4.7k  [0603]  38.35,103 90 top
R81  10k  [0603]  54.36,90.93 180 top
R82  1k  [0603]  35.51,90.86 180 top
R83  10k  [0603]  51.82,88.82 90 top
R84  0  [0603]  50.29,95.86 270 top
R85  4.7k  [0603]  62.51,103 90 top
R86  4.7k  [0603]  64.26,103 90 top
R87  10k  [0603]  80.26,90.93 180 top
R88  1k  [0603]  61.42,90.86 180 top
R89  10k  [0603]  77.72,88.82 90 top
R90  0  [0603]  76.2,95.86 270 top
R91  4.7k  [0603]  88.42,103 90 top
R92  4.7k  [0603]  90.17,103 90 top
R93  10k  [0603]  106.17,90.93 180 top
R94  1k  [0603]  87.33,90.86 180 top
R95  10k  [0603]  103.63,88.82 90 top
R96  0  [0603]  102.11,95.86 270 top
R97  4.7k  [0603]  10.69,128.91 90 top
R98  4.7k  [0603]  12.45,128.91 90 top
R99  10k  [0603]  28.45,116.84 180 top
R100  1k  [0603]  9.6,116.76 180 top
R101  10k  [0603]  25.91,114.73 90 top
R102  0  [0603]  24.38,121.77 270 top
R103  4.7k  [0603]  36.6,128.91 90 top
R104  4.7k  [0603]  38.35,128.91 90 top
R105  10k  [0603]  54.36,116.84 180 top
R106  1k  [0603]  35.51,116.76 180 top
R107  10k  [0603]  51.82,114.73 90 top
R108  0  [0603]  50.29,121.77 270 top
R109  4.7k  [0603]  62.51,128.91 90 top
R110  4.7k  [0603]  64.26,128.91 90 top
R111  10k  [0603]  80.26,116.84 180 top
R112  1k  [0603]  61.42,116.76 180 top
R113  10k  [0603]  77.72,114.73 90 top
R114  0  [0603]  76.2,121.77 270 top
R115  4.7k  [0603]  88.42,128.91 90 top
R116  4.7k  [0603]  90.17,128.91 90 top
R117  10k  [0603]  106.17,116.84 180 top
R118  1k  [0603]  87.33,116.76 180 top
R119  10k  [0603]  103.63,114.73 90 top
R120  0  [0603]  102.11,121.77 270 top
R121  4.7k  [0603]  10.69,154.81 90 top
R122  4.7k  [0603]  12.45,154.81 90 top
R123  10k  [0603]  28.45,142.75 180 top
R124  1k  [0603]  9.6,142.67 180 top
R125  10k  [0603]  25.91,140.64 90 top
R126  0  [0603]  24.38,147.68 270 top
R127  4.7k  [0603]  36.6,154.81 90 top
R128  4.7k  [0603]  38.35,154.81 90 top
R129  10k  [0603]  54.36,142.75 180 top
R130  1k  [0603]  35.51,142.67 180 top
R131  10k  [0603]  51.82,140.64 90 top
R132  0  [0603]  50.29,147.68 270 top
R133  4.7k  [0603]  62.51,154.81 90 top
R134  4.7k  [0603]  64.26,154.81 90 top
R135  10k  [0603]  80.26,142.75 180 top
R136  1k  [0603]  61.42,142.67 180 top
R137  10k  [0603]  77.72,140.64 90 top
R138  0  [0603]  76.2,147.68 270 top
R139  4.7k  [0603]  88.42,154.81 90 top
R140  4.7k  [0603]  90.17,154.81 90 top
R141  10k  [0603]  106.17,142.75 180 top
R142  1k  [0603]  87.33,142.67 180 top
R143  10k  [0603]  103.63,140.64 90 top
R144  0  [0603]  102.11,147.68 270 top
U1  ADXL313  [LFCSP]  19.56,19.56 90 top
U2  ADXL313  [LFCSP]  45.47,19.56 90 top
U3  ADXL313  [LFCSP]  71.37,19.56 90 top
U4  ADXL313  [LFCSP]  97.28,19.56 90 top
U5  ADXL313  [LFCSP]  19.56,45.47 90 top
U6  ADXL313  [LFCSP]  45.47,45.47 90 top
U7  ADXL313  [LFCSP]  71.37,45.47 90 top
U8  ADXL313  [LFCSP]  97.28,45.47 90 top
U9  ADXL313  [LFCSP]  19.56,71.37 90 top
U10  ADXL313  [LFCSP]  45.47,71.37 90 top
U11  ADXL313  [LFCSP]  71.37,71.37 90 top
U12  ADXL313  [LFCSP]  97.28,71.37 90 top
U13  ADXL313  [LFCSP]  19.56,97.28 90 top
U14  ADXL313  [LFCSP]  45.47,97.28 90 top
U15  ADXL313  [LFCSP]  71.37,97.28 90 top
U16  ADXL313  [LFCSP]  97.28,97.28 90 top
U17  ADXL313  [LFCSP]  19.56,123.19 90 top
U18  ADXL313  [LFCSP]  45.47,123.19 90 top
U19  ADXL313  [LFCSP]  71.37,123.19 90 top
U20  ADXL313  [LFCSP]  97.28,123.19 90 top
U21  ADXL313  [LFCSP]  19.56,149.1 90 top
U22  ADXL313  [LFCSP]  45.47,149.1 90 top
U23  ADXL313  [LFCSP]  71.37,149.1 90 top
U24  ADXL313  [LFCSP]  97.28,149.1 90 top
U$1  [TRIPLE0]  22.45,18.92 0 bottom
U$2  [AXIS0]  17.04,18.87 0 bottom
U$3  [ACCELEROMETER0]  19.43,17.35 0 bottom
U$4  [ADXL3130]  19.74,15.42 0 bottom
U$5  [#GND#0]  13.21,8.64 90 top
U$6  [#GND#0]  13.21,8.64 90 bottom
U$7  [#3#3V#0]  15.75,8.64 90 top
U$8  [#3#3V#0]  15.75,8.64 90 bottom
U$9  [#SDA#0]  18.29,8.64 90 top
U$10  [#SDI#0]  18.26,8.61 90 bottom
U$11  [#SCL#0]  20.83,8.64 90 top
U$12  [#_ADR#0]  30.71,14.94 90 bottom
U$13  [#INT2#0]  18.31,30.63 90 top
U$14  [#INT2#0]  18.31,30.63 90 bottom
U$15  [#INT1#0]  20.85,30.63 90 top
U$16  [#INT1#0]  20.85,30.63 90 bottom
U$17  [X0]  27.41,25.55 0 bottom
U$18  [##CS##0]  25.91,8.61 90 bottom
U$19  [ADXL3130]  19.68,24.13 0 top
U$20  [#SCLK#0]  20.8,8.56 90 bottom
U$21  [X0]  25.2,27.2 0 top
U$22  [OPEN#_0X1D0]  29.03,16.08 90 bottom
U$23  [CLOSED#_0X530]  27.94,16.13 90 bottom
U$24  [#LED#0]  9.91,15.49 90 bottom
U$25  [PWR0]  13.06,14.83 0 top
U$26  [Y0]  30.71,22.2 0 bottom
U$27  [#I2C#0]  9.98,26.11 90 bottom
U$28  [#ADR#0]  23.37,8.61 90 top
U$29  [Y0]  28.45,23.98 0 top
U$30  [#SDO#0]  23.37,8.61 90 bottom
U$31  [Z0]  28.57,23.5 0 bottom
U$32  [Z0]  26.29,25.32 0 top
U$33  [TRIPLE0]  48.36,18.92 0 bottom
U$34  [AXIS0]  42.95,18.87 0 bottom
U$35  [ACCELEROMETER0]  45.34,17.35 0 bottom
U$36  [ADXL3130]  45.64,15.42 0 bottom
U$37  [#GND#0]  39.12,8.64 90 top
U$38  [#GND#0]  39.12,8.64 90 bottom
U$39  [#3#3V#0]  41.66,8.64 90 top
U$40  [#3#3V#0]  41.66,8.64 90 bottom
U$41  [#SDA#0]  44.2,8.64 90 top
U$42  [#SCL#0]  46.74,8.64 90 top
U$43  [#INT2#0]  44.22,30.63 90 top
U$44  [#INT2#0]  44.22,30.63 90 bottom
U$45  [#INT1#0]  46.76,30.63 90 top
U$46  [#INT1#0]  46.76,30.63 90 bottom
U$47  [##CS##0]  51.82,8.61 90 bottom
U$48  [OPEN#_0X1D0]  54.94,16.08 90 bottom
U$49  [CLOSED#_0X530]  53.85,16.13 90 bottom
U$50  [#LED#0]  35.81,15.49 90 bottom
U$51  [PWR0]  38.96,14.83 0 top
U$52  [ADXL3130]  45.59,24.13 0 top
U$53  [#I2C#0]  35.89,26.11 90 bottom
U$54  [#SDO#0]  49.28,8.61 90 bottom
U$55  [#ADR#0]  49.28,8.61 90 top
U$56  [#SDI#0]  44.17,8.61 90 bottom
U$57  [#SCLK#0]  46.71,8.56 90 bottom
U$58  [#_ADR#0]  56.62,14.94 90 bottom
U$59  [X0]  53.31,25.55 0 bottom
U$60  [X0]  51.1,27.2 0 top
U$61  [Y0]  56.62,22.2 0 bottom
U$62  [Y0]  54.36,23.98 0 top
U$63  [Z0]  54.48,23.5 0 bottom
U$64  [Z0]  52.2,25.32 0 top
U$65  [TRIPLE0]  74.27,18.92 0 bottom
U$66  [AXIS0]  68.86,18.87 0 bottom
U$67  [ACCELEROMETER0]  71.25,17.35 0 bottom
U$68  [ADXL3130]  71.55,15.42 0 bottom
U$69  [#GND#0]  65.02,8.64 90 top
U$70  [#GND#0]  65.02,8.64 90 bottom
U$71  [#3#3V#0]  67.56,8.64 90 top
U$72  [#3#3V#0]  67.56,8.64 90 bottom
U$73  [#SDA#0]  70.1,8.64 90 top
U$74  [#SCL#0]  72.64,8.64 90 top
U$75  [#INT2#0]  70.13,30.63 90 top
U$76  [#INT2#0]  70.13,30.63 90 bottom
U$77  [#INT1#0]  72.67,30.63 90 top
U$78  [#INT1#0]  72.67,30.63 90 bottom
U$79  [##CS##0]  77.72,8.61 90 bottom
U$80  [OPEN#_0X1D0]  80.85,16.08 90 bottom
U$81  [CLOSED#_0X530]  79.76,16.13 90 bottom
U$82  [#LED#0]  61.72,15.49 90 bottom
U$83  [PWR0]  64.87,14.83 0 top
U$84  [ADXL3130]  71.5,24.13 0 top
U$85  [#I2C#0]  61.8,26.11 90 bottom
U$86  [#SDO#0]  75.18,8.61 90 bottom
U$87  [#ADR#0]  75.18,8.61 90 top
U$88  [#SDI#0]  70.08,8.61 90 bottom
U$89  [#SCLK#0]  72.62,8.56 90 bottom
U$90  [#_ADR#0]  82.52,14.94 90 bottom
U$91  [X0]  79.22,25.55 0 bottom
U$92  [X0]  77.01,27.2 0 top
U$93  [Y0]  82.52,22.2 0 bottom
U$94  [Y0]  80.26,23.98 0 top
U$95  [Z0]  80.39,23.5 0 bottom
U$96  [Z0]  78.11,25.32 0 top
U$97  [TRIPLE0]  100.18,18.92 0 bottom
U$98  [AXIS0]  94.77,18.87 0 bottom
U$99  [ACCELEROMETER0]  97.16,17.35 0 bottom
U$100  [ADXL3130]  97.46,15.42 0 bottom
U$101  [#GND#0]  90.93,8.64 90 top
U$102  [#GND#0]  90.93,8.64 90 bottom
U$103  [#3#3V#0]  93.47,8.64 90 top
U$104  [#3#3V#0]  93.47,8.64 90 bottom
U$105  [#SDA#0]  96.01,8.64 90 top
U$106  [#SCL#0]  98.55,8.64 90 top
U$107  [#INT2#0]  96.04,30.63 90 top
U$108  [#INT2#0]  96.04,30.63 90 bottom
U$109  [#INT1#0]  98.58,30.63 90 top
U$110  [#INT1#0]  98.58,30.63 90 bottom
U$111  [##CS##0]  103.63,8.61 90 bottom
U$112  [OPEN#_0X1D0]  106.76,16.08 90 bottom
U$113  [CLOSED#_0X530]  105.66,16.13 90 bottom
U$114  [#LED#0]  87.63,15.49 90 bottom
U$115  [PWR0]  90.78,14.83 0 top
U$116  [ADXL3130]  97.41,24.13 0 top
U$117  [#I2C#0]  87.71,26.11 90 bottom
U$118  [#SDO#0]  101.09,8.61 90 bottom
U$119  [#ADR#0]  101.09,8.61 90 top
U$120  [#SDI#0]  95.99,8.61 90 bottom
U$121  [#SCLK#0]  98.53,8.56 90 bottom
U$122  [#_ADR#0]  108.43,14.94 90 bottom
U$123  [X0]  105.13,25.55 0 bottom
U$124  [X0]  102.92,27.2 0 top
U$125  [Y0]  108.43,22.2 0 bottom
U$126  [Y0]  106.17,23.98 0 top
U$127  [Z0]  106.3,23.5 0 bottom
U$128  [Z0]  104.01,25.32 0 top
U$129  [TRIPLE0]  22.45,44.83 0 bottom
U$130  [AXIS0]  17.04,44.78 0 bottom
U$131  [ACCELEROMETER0]  19.43,43.26 0 bottom
U$132  [ADXL3130]  19.74,41.33 0 bottom
U$133  [#GND#0]  13.21,34.54 90 top
U$134  [#GND#0]  13.21,34.54 90 bottom
U$135  [#3#3V#0]  15.75,34.54 90 top
U$136  [#3#3V#0]  15.75,34.54 90 bottom
U$137  [#SDA#0]  18.29,34.54 90 top
U$138  [#SCL#0]  20.83,34.54 90 top
U$139  [#INT2#0]  18.31,56.54 90 top
U$140  [#INT2#0]  18.31,56.54 90 bottom
U$141  [#INT1#0]  20.85,56.54 90 top
U$142  [#INT1#0]  20.85,56.54 90 bottom
U$143  [##CS##0]  25.91,34.52 90 bottom
U$144  [OPEN#_0X1D0]  29.03,41.99 90 bottom
U$145  [CLOSED#_0X530]  27.94,42.04 90 bottom
U$146  [#LED#0]  9.91,41.4 90 bottom
U$147  [PWR0]  13.06,40.74 0 top
U$148  [ADXL3130]  19.68,50.04 0 top
U$149  [#I2C#0]  9.98,52.02 90 bottom
U$150  [#SDO#0]  23.37,34.52 90 bottom
U$151  [#ADR#0]  23.37,34.52 90 top
U$152  [#SDI#0]  18.26,34.52 90 bottom
U$153  [#SCLK#0]  20.8,34.47 90 bottom
U$154  [#_ADR#0]  30.71,40.84 90 bottom
U$155  [X0]  27.41,51.46 0 bottom
U$156  [X0]  25.2,53.11 0 top
U$157  [Y0]  30.71,48.11 0 bottom
U$158  [Y0]  28.45,49.89 0 top
U$159  [Z0]  28.57,49.4 0 bottom
U$160  [Z0]  26.29,51.23 0 top
U$161  [TRIPLE0]  48.36,44.83 0 bottom
U$162  [AXIS0]  42.95,44.78 0 bottom
U$163  [ACCELEROMETER0]  45.34,43.26 0 bottom
U$164  [ADXL3130]  45.64,41.33 0 bottom
U$165  [#GND#0]  39.12,34.54 90 top
U$166  [#GND#0]  39.12,34.54 90 bottom
U$167  [#3#3V#0]  41.66,34.54 90 top
U$168  [#3#3V#0]  41.66,34.54 90 bottom
U$169  [#SDA#0]  44.2,34.54 90 top
U$170  [#SCL#0]  46.74,34.54 90 top
U$171  [#INT2#0]  44.22,56.54 90 top
U$172  [#INT2#0]  44.22,56.54 90 bottom
U$173  [#INT1#0]  46.76,56.54 90 top
U$174  [#INT1#0]  46.76,56.54 90 bottom
U$175  [##CS##0]  51.82,34.52 90 bottom
U$176  [OPEN#_0X1D0]  54.94,41.99 90 bottom
U$177  [CLOSED#_0X530]  53.85,42.04 90 bottom
U$178  [#LED#0]  35.81,41.4 90 bottom
U$179  [PWR0]  38.96,40.74 0 top
U$180  [ADXL3130]  45.59,50.04 0 top
U$181  [#I2C#0]  35.89,52.02 90 bottom
U$182  [#SDO#0]  49.28,34.52 90 bottom
U$183  [#ADR#0]  49.28,34.52 90 top
U$184  [#SDI#0]  44.17,34.52 90 bottom
U$185  [#SCLK#0]  46.71,34.47 90 bottom
U$186  [#_ADR#0]  56.62,40.84 90 bottom
U$187  [X0]  53.31,51.46 0 bottom
U$188  [X0]  51.1,53.11 0 top
U$189  [Y0]  56.62,48.11 0 bottom
U$190  [Y0]  54.36,49.89 0 top
U$191  [Z0]  54.48,49.4 0 bottom
U$192  [Z0]  52.2,51.23 0 top
U$193  [TRIPLE0]  74.27,44.83 0 bottom
U$194  [AXIS0]  68.86,44.78 0 bottom
U$195  [ACCELEROMETER0]  71.25,43.26 0 bottom
U$196  [ADXL3130]  71.55,41.33 0 bottom
U$197  [#GND#0]  65.02,34.54 90 top
U$198  [#GND#0]  65.02,34.54 90 bottom
U$199  [#3#3V#0]  67.56,34.54 90 top
U$200  [#3#3V#0]  67.56,34.54 90 bottom
U$201  [#SDA#0]  70.1,34.54 90 top
U$202  [#SCL#0]  72.64,34.54 90 top
U$203  [#INT2#0]  70.13,56.54 90 top
U$204  [#INT2#0]  70.13,56.54 90 bottom
U$205  [#INT1#0]  72.67,56.54 90 top
U$206  [#INT1#0]  72.67,56.54 90 bottom
U$207  [##CS##0]  77.72,34.52 90 bottom
U$208  [OPEN#_0X1D0]  80.85,41.99 90 bottom
U$209  [CLOSED#_0X530]  79.76,42.04 90 bottom
U$210  [#LED#0]  61.72,41.4 90 bottom
U$211  [PWR0]  64.87,40.74 0 top
U$212  [ADXL3130]  71.5,50.04 0 top
U$213  [#I2C#0]  61.8,52.02 90 bottom
U$214  [#SDO#0]  75.18,34.52 90 bottom
U$215  [#ADR#0]  75.18,34.52 90 top
U$216  [#SDI#0]  70.08,34.52 90 bottom
U$217  [#SCLK#0]  72.62,34.47 90 bottom
U$218  [#_ADR#0]  82.52,40.84 90 bottom
U$219  [X0]  79.22,51.46 0 bottom
U$220  [X0]  77.01,53.11 0 top
U$221  [Y0]  82.52,48.11 0 bottom
U$222  [Y0]  80.26,49.89 0 top
U$223  [Z0]  80.39,49.4 0 bottom
U$224  [Z0]  78.11,51.23 0 top
U$225  [TRIPLE0]  100.18,44.83 0 bottom
U$226  [AXIS0]  94.77,44.78 0 bottom
U$227  [ACCELEROMETER0]  97.16,43.26 0 bottom
U$228  [ADXL3130]  97.46,41.33 0 bottom
U$229  [#GND#0]  90.93,34.54 90 top
U$230  [#GND#0]  90.93,34.54 90 bottom
U$231  [#3#3V#0]  93.47,34.54 90 top
U$232  [#3#3V#0]  93.47,34.54 90 bottom
U$233  [#SDA#0]  96.01,34.54 90 top
U$234  [#SCL#0]  98.55,34.54 90 top
U$235  [#INT2#0]  96.04,56.54 90 top
U$236  [#INT2#0]  96.04,56.54 90 bottom
U$237  [#INT1#0]  98.58,56.54 90 top
U$238  [#INT1#0]  98.58,56.54 90 bottom
U$239  [##CS##0]  103.63,34.52 90 bottom
U$240  [OPEN#_0X1D0]  106.76,41.99 90 bottom
U$241  [CLOSED#_0X530]  105.66,42.04 90 bottom
U$242  [#LED#0]  87.63,41.4 90 bottom
U$243  [PWR0]  90.78,40.74 0 top
U$244  [ADXL3130]  97.41,50.04 0 top
U$245  [#I2C#0]  87.71,52.02 90 bottom
U$246  [#SDO#0]  101.09,34.52 90 bottom
U$247  [#ADR#0]  101.09,34.52 90 top
U$248  [#SDI#0]  95.99,34.52 90 bottom
U$249  [#SCLK#0]  98.53,34.47 90 bottom
U$250  [#_ADR#0]  108.43,40.84 90 bottom
U$251  [X0]  105.13,51.46 0 bottom
U$252  [X0]  102.92,53.11 0 top
U$253  [Y0]  108.43,48.11 0 bottom
U$254  [Y0]  106.17,49.89 0 top
U$255  [Z0]  106.3,49.4 0 bottom
U$256  [Z0]  104.01,51.23 0 top
U$257  [TRIPLE0]  22.45,70.74 0 bottom
U$258  [AXIS0]  17.04,70.69 0 bottom
U$259  [ACCELEROMETER0]  19.43,69.16 0 bottom
U$260  [ADXL3130]  19.74,67.23 0 bottom
U$261  [#GND#0]  13.21,60.45 90 top
U$262  [#GND#0]  13.21,60.45 90 bottom
U$263  [#3#3V#0]  15.75,60.45 90 top
U$264  [#3#3V#0]  15.75,60.45 90 bottom
U$265  [#SDA#0]  18.29,60.45 90 top
U$266  [#SCL#0]  20.83,60.45 90 top
U$267  [#INT2#0]  18.31,82.45 90 top
U$268  [#INT2#0]  18.31,82.45 90 bottom
U$269  [#INT1#0]  20.85,82.45 90 top
U$270  [#INT1#0]  20.85,82.45 90 bottom
U$271  [##CS##0]  25.91,60.43 90 bottom
U$272  [OPEN#_0X1D0]  29.03,67.89 90 bottom
U$273  [CLOSED#_0X530]  27.94,67.95 90 bottom
U$274  [#LED#0]  9.91,67.31 90 bottom
U$275  [PWR0]  13.06,66.65 0 top
U$276  [ADXL3130]  19.68,75.95 0 top
U$277  [#I2C#0]  9.98,77.93 90 bottom
U$278  [#SDO#0]  23.37,60.43 90 bottom
U$279  [#ADR#0]  23.37,60.43 90 top
U$280  [#SDI#0]  18.26,60.43 90 bottom
U$281  [#SCLK#0]  20.8,60.38 90 bottom
U$282  [#_ADR#0]  30.71,66.75 90 bottom
U$283  [X0]  27.41,77.37 0 bottom
U$284  [X0]  25.2,79.02 0 top
U$285  [Y0]  30.71,74.02 0 bottom
U$286  [Y0]  28.45,75.79 0 top
U$287  [Z0]  28.57,75.31 0 bottom
U$288  [Z0]  26.29,77.14 0 top
U$289  [TRIPLE0]  48.36,70.74 0 bottom
U$290  [AXIS0]  42.95,70.69 0 bottom